# Altium PCB PCB1.PcbDoc
Units mil, origin at the board's own origin, x right, y up, seen from the top; angles counter-clockwise.
Board outline 1771.65 x 708.66 mil, 4 copper layers (Top Layer, Layer 1 (GND), Layer 2 (PWR), Bottom Layer), stack 21.508 mil thick; 30 components, 42 nets, 155 pads, 41 vias.
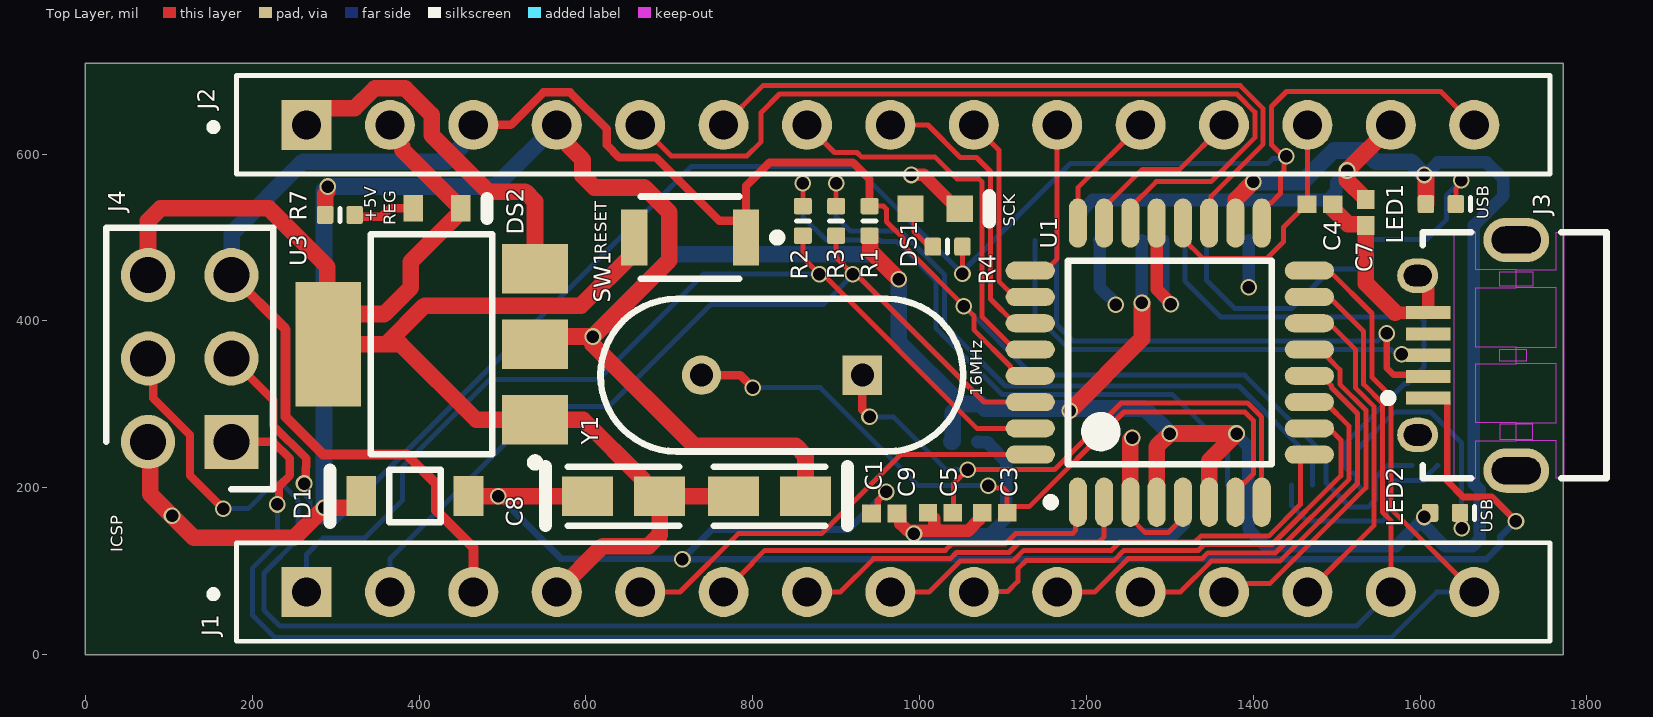
[diagram p0: Top Layer view]
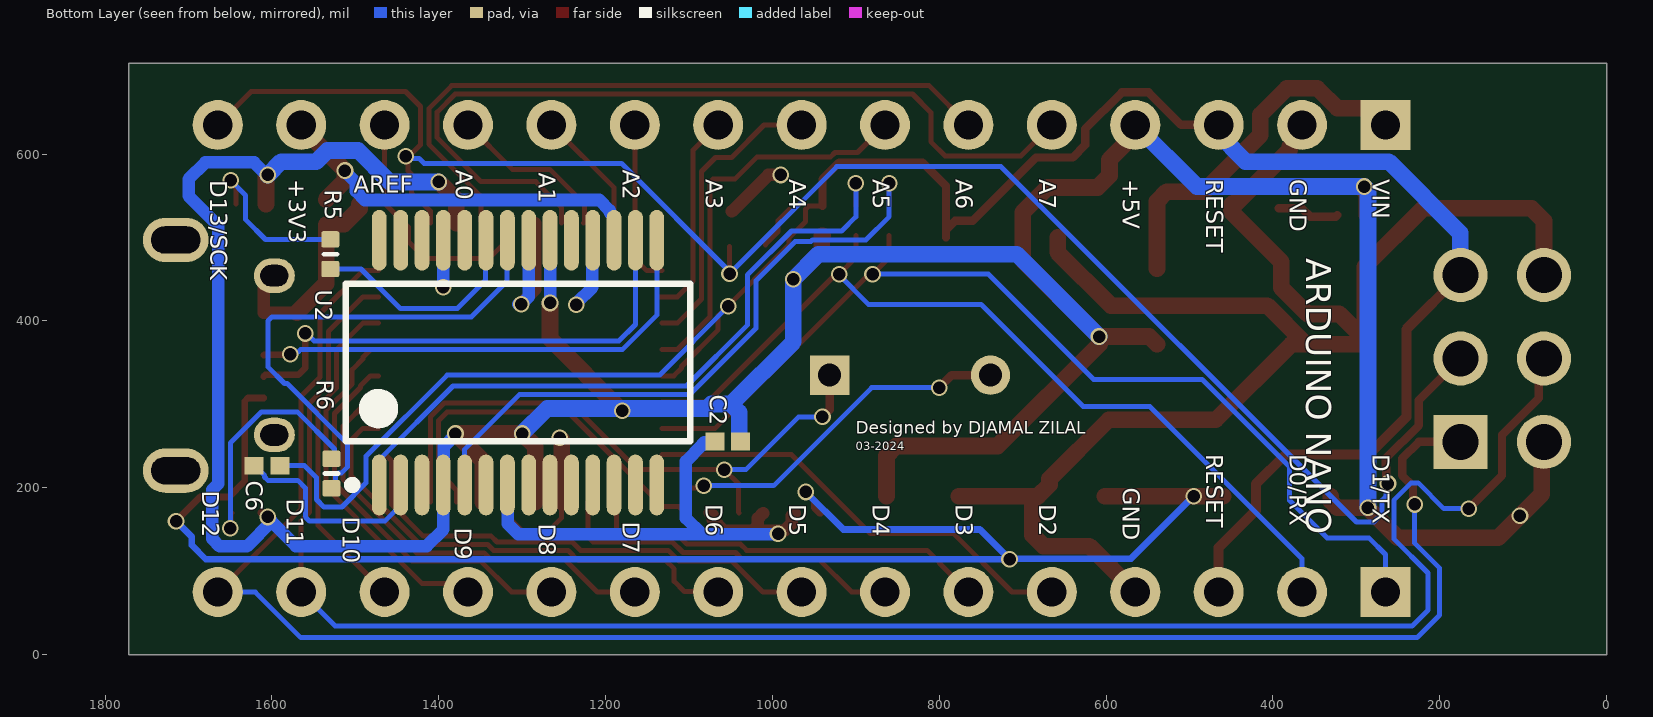
[diagram p1: Bottom Layer view, seen from below]
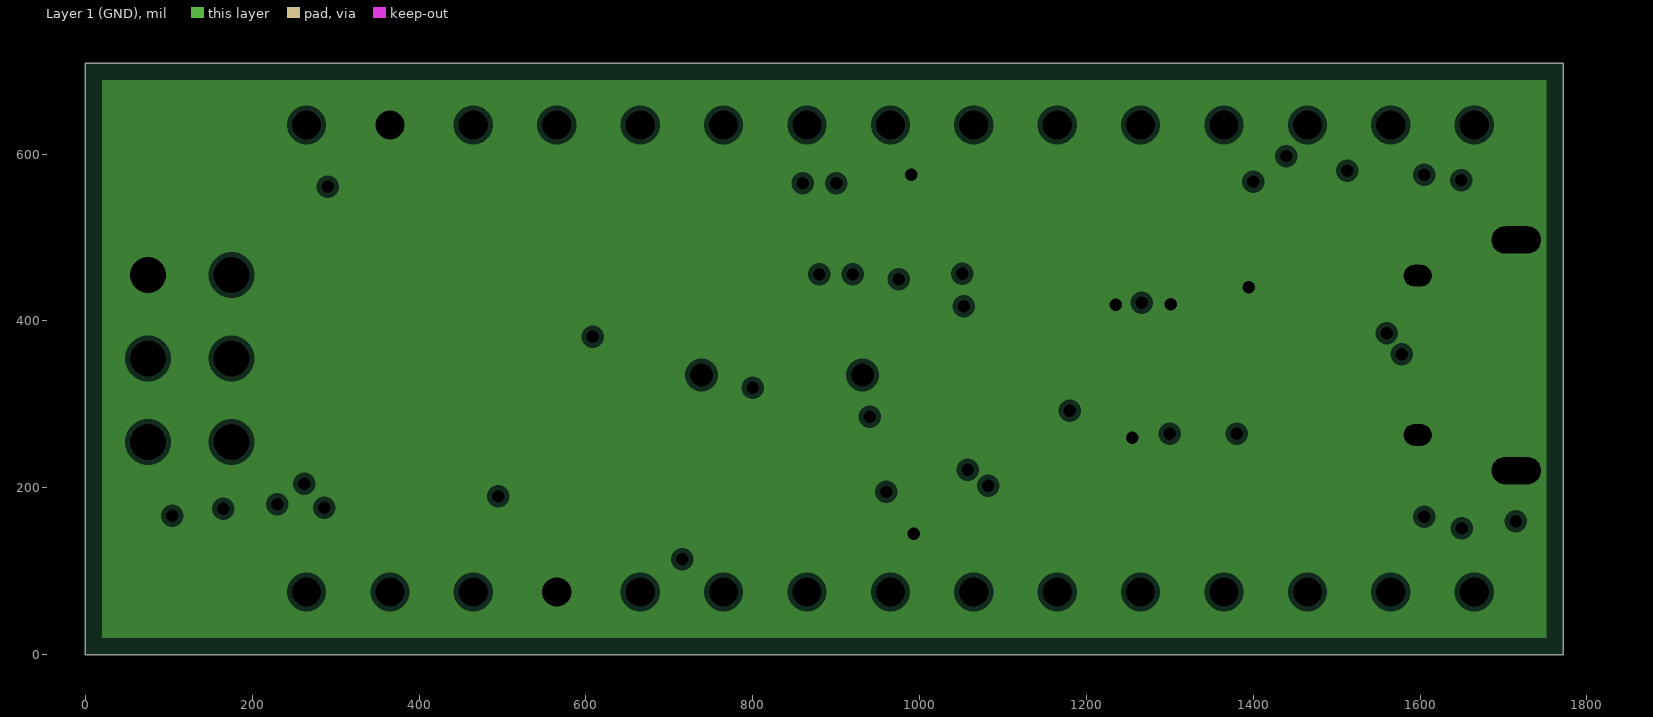
[diagram p2: Layer 1 (GND), clearances drawn from the general rule]
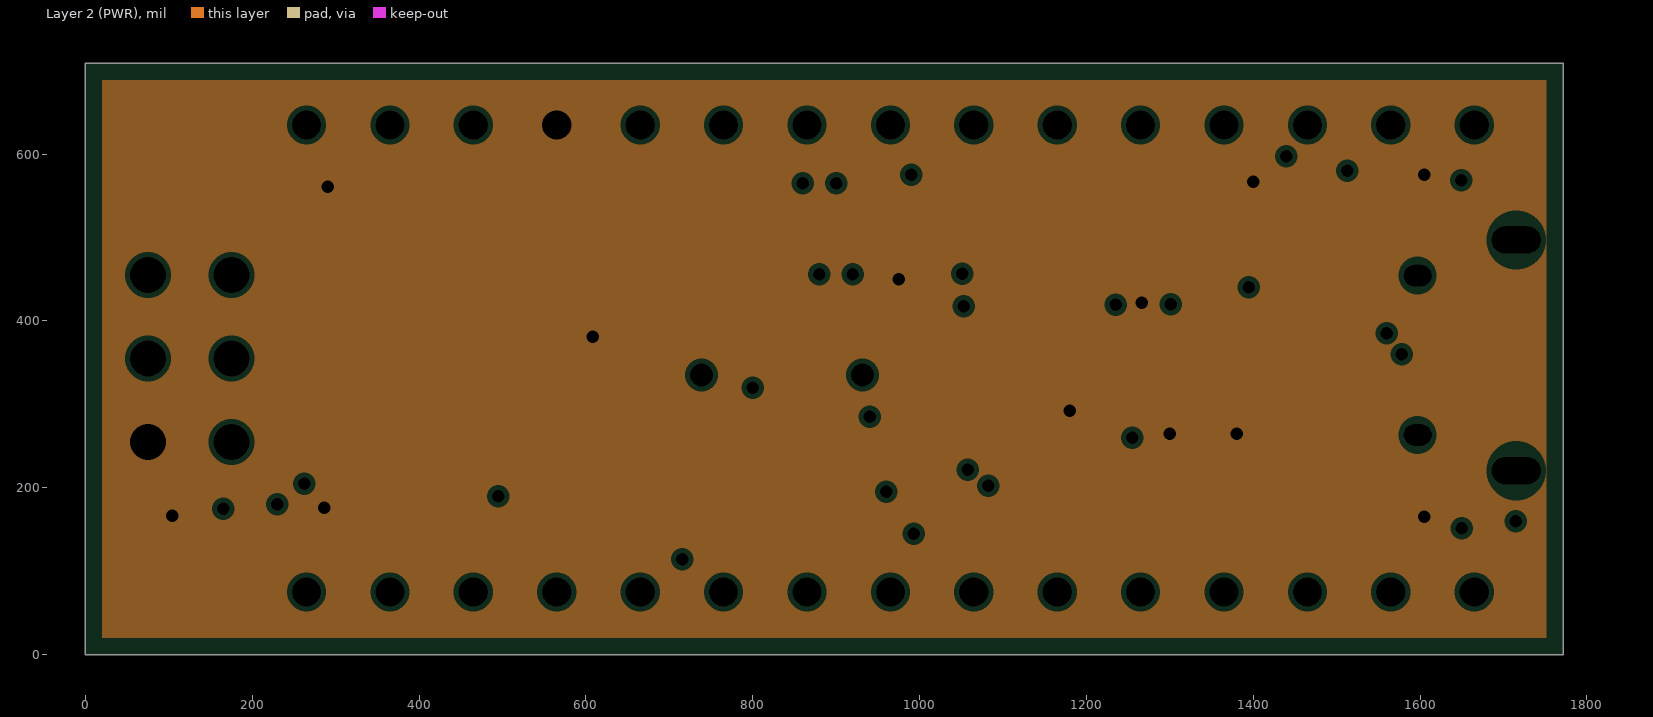
[diagram p3: Layer 2 (PWR), clearances drawn from the general rule]
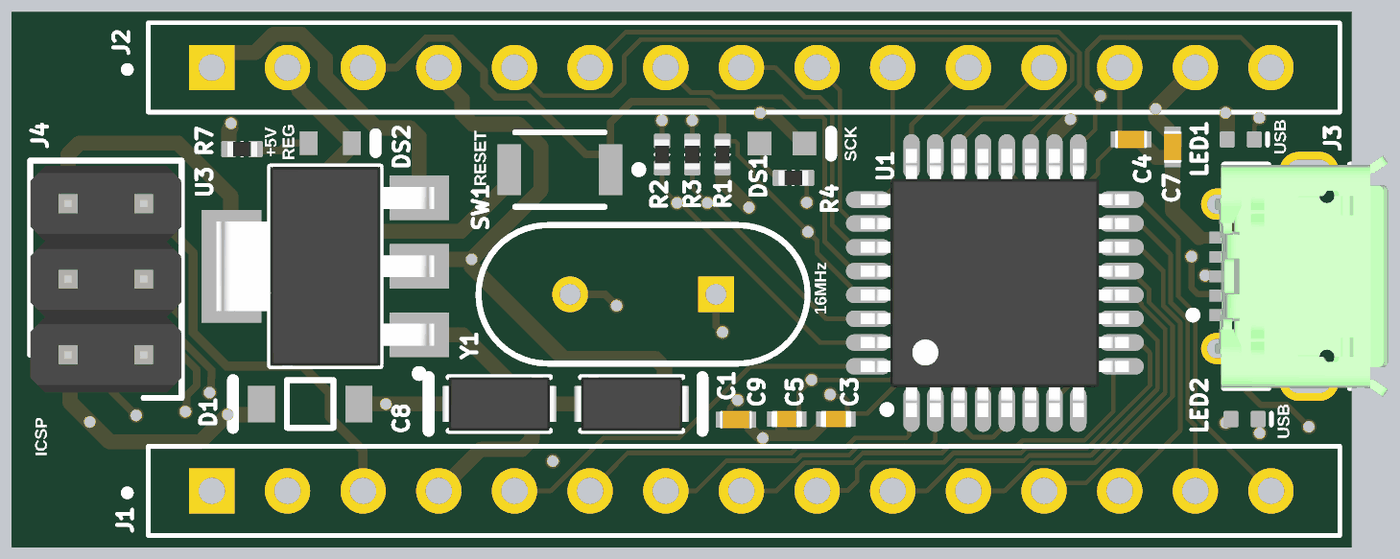
[diagram p4: 3D render of the assembled board from above, using the file's embedded part models]
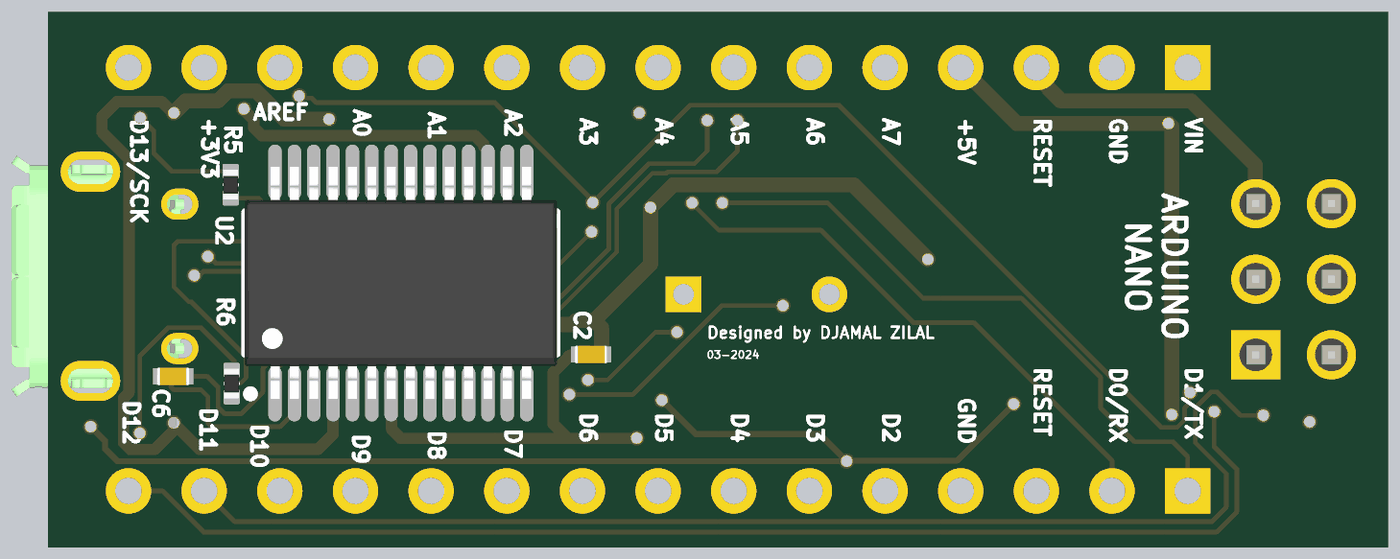
[diagram p5: 3D render of the assembled board from below, using the file's embedded part models]

## Layer stack, top to bottom
Top Solder: solder mask 0.4, Solder Resist, Dk 3.5
Top Layer: signal copper 1.4
Dielectric 2: prepreg 2.8, PP-006, Dk 4.1
Layer 1 (GND): plane copper 0.254, net GND
Dielectric 1: dielectric 12.6, FR-4, Dk 4.8
Layer 2 (PWR): plane copper 0.254, net +5V
Dielectric 3: prepreg 2.8, PP-006, Dk 4.1
Bottom Layer: signal copper 1.4
Bottom Solder: solder mask 0.4, Solder Resist, Dk 3.5

## Board outline
0,0 0,708.66 1771.65,708.66 1771.65,0

## Design rules (kind name [scope] priority, off if disabled: settings)
Clearance [All] p1: gap=4 ignorepadtopadclearanceinfootprint=FALSE
ComponentClearance [All] p1: gap=6 collisioncheckmode=3 verticalgap=6 showdistances=FALSE
DiffPairsRouting [All] p1: maxlimit=10 minlimit=6 mostfreqgap=8 toplayer_minwidth=6 toplayer_maxwidth=15 toplayer_prefwidth=6 bottomlayer_minwidth=6 bottomlayer_maxwidth=15 bottomlayer_prefwidth=6 maxuncoupledlength=500
HoleToHoleClearance [All] p1: gap=6 allowstackedmicrovias=TRUE
MinimumSolderMaskSliver [All] p1: minsoldermaskwidth=4
PlaneClearance [All] p1: clearance=6
PlaneConnect [All] p1: planeconnectstyle=Relief reliefexpansion=20 reliefentries=4 reliefconductorwidth=10 reliefairgap=10
PolygonConnect [All] p1: connectstyle=Relief reliefconductorwidth=10 reliefentries=4 polygonreliefangle="90 Angle" airgapwidth=10
RoutingVias [All] p1: holewidth=6 width=20 viastyle="Through Hole" minholewidth=6 minwidth=20 maxholewidth=20 maxwidth=50
SilkToSilkClearance [All] p1: silktosilkclearance=6
SilkToSolderMaskClearance [IsPad] p1: minsilkscreentomaskgap=4 clearancetoexposedcopper=TRUE
SolderMaskExpansion [All] p1: expansion=0 istentingtop=FALSE
Width [All] p1: maxlimit=20 minlimit=6 preferedwidth=6 minimp=50.000000 maximp=50.000000 favimp=50.000000
22 further rules are at their usual default settings.

## Components (designator, comment, footprint, x,y, rotation, side; value= is the part's Value field where it differs from the comment)
C1 "TAJA475K016RNJ" AVX-TAJ-A-2_L 820,190 r180 top value=4.7µF
C2 "Capacitor 0.1 uF +/- 5% 16 V 0402" CAPC1005X56X25LL10T15 1053.72,255.42 r180 bottom value=100nF
C3 "Capacitor 10 pF +/- 0.25 pF 50 V 0402" CAPC1005X55X30LL05T10 1090,170 r0 top value=10pF
C4 "Capacitor 0.1 uF +/- 5% 16 V 0402" CAPC1005X56X25LL10T15 1480,540 r0 top value=100nF
C5 "Capacitor 10 pF +/- 0.25 pF 50 V 0402" CAPC1005X55X30LL05T10 1025,170 r0 top value=10pF
C6 "Capacitor 0.1 uF +/- 5% 16 V 0402" CAPC1005X56X25LL10T15 1605.95,226.47 r180 bottom value=100nF
C7 "Capacitor 0.1 uF +/- 5% 16 V 0402" CAPC1005X56X25LL10T15 1535,530 r90 top value=100nF
C8 "TAJA475K016RNJ" AVX-TAJ-A-2_L 645,190 r0 top value=4.7µF
C9 "Capacitor 0.1 uF +/- 5% 16 V 0402" CAPC1005X56X25LL10T15 957.78,169.28 r180 top value=100nF
D1 "MBR0520LT1G" ONSC-SOD-123-2-425-04_V 395,190 r180 top
DS1 "HSMA-C190" AVAG-HSMX-C190_V 1018.55,534.37 r0 top
DS2 "TLMB1100-GS08" VISH-TLMX1100-2_V 421.46,535 r0 top
J1 "both parts are inseparated" PCBComponent_1 181.02,15.94 r0 top
J2 "both parts are inseparated" PCBComponent_1 181.02,575.94 r0 top
J3 "ZX62D-B-5P8" HIRO-ZX62D-B-5P8_V 1656.26,358.82 r90 top
J4 "M20-9720345" HDRV6W64P254_2X3_762X508X864P 175,255 r90 top
LED1 "QBLP595-R" QTB-QBLP595_V 1625,540 r180 top
LED2 "QBLP595-IG" QTB-QBLP595_V 1630,170 r180 top
R1 "1KR2J" RESC0402(1005)_L 940,520 r270 top value=1k
R2 "1KR2J" RESC0402(1005)_L 860,520 r90 top value=1k
R3 "1KR2J" RESC0402(1005)_L 900,520 r90 top value=1k
R4 "330R2J" RESC0402(1005)_L 1033.69,489.07 r0 top value=330
R5 "330R2J" RESC0402(1005)_L 1530,480 r90 bottom value=330
R6 "330R2J" RESC0402(1005)_L 1528.76,217.01 r90 bottom value=330
R7 "330R2J" RESC0402(1005)_L 305,527.08 r180 top value=330
SW1 "B3U-1000P" OMRON-B3U-1000_V 725,500 r180 top
U1 "ATMEGA328/P" ATMEGA328/P 1300,350 r90 top
U2 "FT232RL-REEL" FTDI-SSOP-28_M 1305,350 r90 bottom
U3 "NCP1117ST50T3G" ONSC-SOT-223-4-318H-01_A_V 415,372.08 r180 top
Y1 "HC-49US 16.000MHZ" JPY-HC-49US 835,335 r180 top

## Footprints (in the part's own frame and the unit in brackets; to place one, negate y for a bottom-side part, rotate by r counter-clockwise, add the part's x,y. Pads: shape width x height; smd on the part's side, far side on the other; paste and mask are expansions set on the pad)
ATMEGA328/P [mm] "TQFP, 32-Leads, Body 7,00x7,00mm, Pitch 0,80mm, IPC Medium Density"
  oval 1.5x0.55 smd: 1(-4.25,2.8) 2(-4.25,2) 3(-4.25,1.2) 4(-4.25,0.4) 5(-4.25,-0.4) 6(-4.25,-1.2) 7(-4.25,-2) 8(-4.25,-2.8) 17(4.25,-2.8) 18(4.25,-2) 19(4.25,-1.2) 20(4.25,-0.4) 21(4.25,0.4) 22(4.25,1.2) 23(4.25,2) 24(4.25,2.8)
  oval 0.55x1.5 smd: 9(-2.8,-4.25) 10(-2,-4.25) 11(-1.2,-4.25) 12(-0.4,-4.25) 13(0.4,-4.25) 14(1.2,-4.25) 15(2,-4.25) 16(2.8,-4.25) 25(2.8,4.25) 26(2,4.25) 27(1.2,4.25) 28(0.4,4.25) 29(-0.4,4.25) 30(-1.2,4.25) 31(-2,4.25) 32(-2.8,4.25)
  silkscreen extent -4.37,-3.1 3.1,3.75, body extent -4.5,-4.5 4.5,4.5, height 1.2
AVAG-HSMX-C190_V [mm] "SMD, 2-Leads, Body 1.6x0.8mm, Height 0.9mm"
  rect 0.8x0.8 smd: 1(-0.75,0) 2(0.75,0)
  silkscreen extent 1.65,-0.4 1.65,0.4, body extent -0.8,-0.4 0.8,0.4, height 0.9
AVX-TAJ-A-2_L [mm] "Molded Capacitor, 2-Leads, Body 3.4x1.8mm, IPC High Density"
  rect 1.55x1.2 smd: 1(-1.1,0) 2(1.1,0)
  silkscreen extent -2.37,-0.9 1.7,0.9, body extent -1.92,-0.9 1.92,0.9, height 1.8
CAPC1005X55X30LL05T10 [mm] "Chip Capacitor, 2-Leads, Body 1.05x0.55mm, IPC High Density"
  rect 0.56x0.52 smd: 1(-0.38,0) 2(0.38,0)
  body extent -0.53,-0.28 0.53,0.28, height 0.55
CAPC1005X56X25LL10T15 [mm] "Chip Capacitor, 2-Leads, Body 1.10x0.60mm, IPC High Density"
  rect 0.58x0.54 smd: 1(-0.39,0) 2(0.39,0)
  body extent -0.55,-0.3 0.55,0.3, height 0.56
FTDI-SSOP-28_M [mm] "SOP, 28-Leads, Body 10.5x5.6mm, Pitch 0.65mm, IPC Low Density"
  oval 1.85x0.45 smd: 1(-3.725,4.225) 2(-3.725,3.575) 3(-3.725,2.925) 4(-3.725,2.275) 5(-3.725,1.625) 6(-3.725,0.975) 7(-3.725,0.325) 8(-3.725,-0.325) 9(-3.725,-0.975) 10(-3.725,-1.625) 11(-3.725,-2.275) 12(-3.725,-2.925) 13(-3.725,-3.575) 14(-3.725,-4.225) 15(3.725,-4.225) 16(3.725,-3.575) 17(3.725,-2.925) 18(3.725,-2.275) 19(3.725,-1.625) 20(3.725,-0.975) 21(3.725,-0.325) 22(3.725,0.325) 23(3.725,0.975) 24(3.725,1.625) 25(3.725,2.275) 26(3.725,2.925) 27(3.725,3.575) 28(3.725,4.225)
  silkscreen extent -3.85,-5.25 2.4,5.25, body extent -3.9,-5.25 3.9,5.25, height 2
HDRV6W64P254_2X3_762X508X864P [mm]
  rect 1.65x1.65 hole 1.1: 1(0,0)
  round 1.65 hole 1.1: 2(0,2.54) 3(2.54,0) 4(2.54,2.54) 5(5.08,0) 6(5.08,2.54)
  silkscreen extent -1.45,-1.27 6.53,3.81, body extent -1.27,-1.27 6.35,3.81, height 9.5
HIRO-ZX62D-B-5P8_V [mm] "Micro-USB Connector, 9-Leads, Body 7.5x5.6mm, Pitch 0.65mm"
  rect 0.4x1.35 smd: 1(-1.3,1.175) 2(-0.65,1.175) 3(0,1.175) 4(0.65,1.175) 5(1.3,1.175)
  oval 1.05x1.25 hole 0.65 slot 0.85 at 90 deg: 6(-2.425,1.5) 7(2.425,1.5)
  oval 1.35x2 hole 0.825 slot 1.5 at 90 deg: 8(-3.512,-1.5) 9(3.512,-1.5)
  Top Layer keep-out region: 2.55,-2 2.1,-2 2.1,-1 2.55,-1
  Top Layer keep-out region: -2.55,-2 -2.1,-2 -2.1,-1 -2.55,-1
  Top Layer keep-out region: -0.18,-1.8 -0.18,-1 0.18,-1 0.18,-1.8
  Top Layer keep-out region: -3.75,-2.725 -2.6,-2.725 -2.6,-1.5 -2.05,-1.5 -2.05,-2.725 -0.25,-2.725 -0.25,-1.5 0.25,-1.5 0.25,-2.725 2.05,-2.725 2.05,-1.5 2.6,-1.5 2.6,-2.725 3.75,-2.725 3.75,-2.95 -3.75,-2.95
  Top Layer keep-out region: -2.6,-1.5 -2.05,-1.5 -2.05,-0.275 -0.25,-0.275 -0.25,-1.5 0.25,-1.5 0.25,-0.275 2.05,-0.275 2.05,-1.5 2.6,-1.5 2.6,-0.275 3.75,-0.275 3.75,0.395 -3.75,0.395 -3.75,-0.275 -2.6,-0.275
  silkscreen extent -3.75,-4.25 3.75,2.52, body extent -4.05,-4.15 4.05,1.65, height 2.75
JPY-HC-49US [mm] "THD, 2-Leads, Body 11.05x4.65mm, Pitch 4.9mm"
  rect 1.2x1.2 hole 0.7: 1(-2.45,0)
  round 1.2 hole 0.7: 2(2.45,0)
  silkscreen extent -5.53,-2.32 5.53,2.32, body extent -5.53,-2.33 5.52,2.32, height 3.5
OMRON-B3U-1000_V [mm] "SMD, 2-Leads, Body 3x2.5mm"
  rect 0.8x1.7 smd: 1(-1.7,0) 2(1.7,0)
  silkscreen extent -2.78,-1.25 1.5,1.25, body extent -1.5,-1.25 1.5,1.25, height 1.75
ONSC-SOD-123-2-425-04_V [mm] "SOD, 2-Leads, Body 2.69x1.6mm"
  rect 0.91x1.22 smd: 1(-1.635,0) 2(1.635,0)
  silkscreen extent -0.78,-0.8 2.59,0.8, body extent -1.35,-0.8 1.35,0.8, height 1.35
ONSC-SOT-223-4-318H-01_A_V [mm] "SOT223, 4-Leads, Body 6.7x3.7mm, Pitch 2.3mm"
  rect 2x1.5 smd: 1(-3.15,2.3) 2(-3.15,0) 3(-3.15,-2.3)
  rect 2x3.8 smd: 4(3.15,0)
  silkscreen extent -3.27,-3.35 1.85,3.72, body extent -3.65,-3.35 3.65,3.35, height 1.8
PCBComponent_1 [mil]
  rect 60x60 hole 35: 1(83.98,59.06)
  round 60 hole 35: 2(183.98,59.06) 3(283.98,59.06) 4(383.98,59.06) 5(483.98,59.06) 6(583.98,59.06) 7(683.98,59.06) 8(783.98,59.06) 9(883.98,59.06) 10(983.98,59.06) 11(1083.98,59.06) 12(1183.98,59.06) 13(1283.98,59.06) 14(1383.98,59.06) 15(1483.98,59.06)
  silkscreen extent -31,0 1575,118
QTB-QBLP595_V [mm] "SMD, 2-Leads, Body 1x0.5mm"
  rrect25% 0.5x0.55 smd: 1(-0.455,0) 2(0.455,0)
  silkscreen extent -0.9,-0.2 -0.9,0.2, body extent -0.5,-0.25 0.5,0.25, height 0.5
RESC0402(1005)_L [mm] "Chip Resistor, Body 1.0x0.5mm, IPC High Density"
  rrect25% 0.5x0.55 smd: 1(-0.45,0) 2(0.45,0)
  silkscreen extent 0,-0.2 0,0.2, body extent -0.5,-0.25 0.5,0.25, height 0.3
VISH-TLMX1100-2_V [mm] "SMD, 2-Leads, Body 1.6x0.8mm"
  rect 0.6x0.8 smd: 1(-0.725,0) 2(0.725,0)
  silkscreen extent 1.53,-0.3 1.53,0.3, body extent -0.8,-0.4 0.8,0.4, height 0.65

## Part data
C1 C8: library part CMP-001-00033-7, "Aluminum Electrolytic Capacitor, 4.7 uF, +/- 20%, 50 V, -40 to 85 degC, 2-Pin THD, RoHS, Bulk", Capacitor Type=Electrolytic, Case/Package=Radial, Manufacturer=Panasonic, Max Operating Temperature=85°C, Min Operating Temperature=-40°C, Package Description="2-Pin Radial Lead, Dia 5 mm, Height 12 mm", Package Quantity=200, Package Reference=CAPPR55-200-1100X500X1200, Ripple Current=45mA, Tolerance=20%, Voltage Rating=50V, Datasheet URL=https://industrial.panasonic.com/cdbs/www-data/pdf/RDF0000/ABA0000C1218.pdf, Datasheet Version="Rev. 05, 10/2016", Diameter=5mm, Lead Pitch=2mm, Manufacturer URL=http://www.panasonic.com/, Mounting Technology=TH, Packaging=Bulk, Pins=2, Ripple Current (AC)=45mA, RoHS Compliant=True
C2 C4 C6 C7 C9: library part CMP-001-00001-6, "Chip Capacitor, 0.1 uF, +/- 5%, 16 V, 0402 (1005 Metric)", Capacitor Type=Ceramic, Case/Package=0402, Max Operating Temperature=125°C, Min Operating Temperature=-55°C, Tolerance=5%, Voltage Rating=16V, Mounting Technology=SM, Pins=2, RoHS Compliant=True
C3 C5: library part CMP-001-00011-6, "Chip Capacitor, 10 pF, +/- 0.25 pF, 50 V, 0402 (1005 Metric)", Capacitor Type=Ceramic, Case/Package=0402, Max Operating Temperature=125°C, Min Operating Temperature=-55°C, Tolerance=0.25%, Voltage Rating=50V, Mounting Technology=SM, Pins=2, RoHS Compliant=True
D1: library part CMP-004-00003-2, "Schottky Power Rectifier, 20 V, 5.5 A, -65 to 125 degC, 2-Pin SMD, RoHS, Tape and Reel", Case/Package=SOD, Forward Current=500mA, Forward Voltage=385mV, Manufacturer="ON Semiconductor", Max Operating Temperature=125°C, Max Surge Current=5.5A, Min Operating Temperature=-65°C, Package Description="2-Pin Surface Mount Device, Body 2.69 x 1.6 mm", Package Quantity=3000, Package Reference=SOD-123-2-425-04, Peak Reverse Current=250uA, Datasheet URL=http://www.onsemi.cn/pub_link/Collateral/MBR0520LT1-D.PDF, Datasheet Version="Rev. 6, 01/2012", Elements=1, Manufacturer URL=http://www.onsemi.com/, Mounting Technology=SM, Packaging=TapeandReel, Pins=2, RoHS Compliant=True
DS1: library part CMP-007-00011-2, "LED Uni-Color Amber, 60 mW, 20 mA, -40 to 85 degC, 2-Pin SMD, RoHS, Tape and Reel", Case/Package=0603, Colour=Orange, Forward Current=20mA, Forward Voltage=1.9V, Manufacturer=Avago, Max Operating Temperature=85°C, Min Operating Temperature=-40°C, Package Description="2-Pin Surface Mount Device, Body 1.6 x 0.8 mm, Height 0.9 mm", Package Quantity=4000, Package Reference=HSMX-C190, Power=60mW, Datasheet URL=http://docs.avagotech.com/docs/AV02-0112EN, Datasheet Version=Sep-10, Illumination Colour=Orange, Lens Style=Diffused, Luminous Intensity=90mcd, Manufacturer URL=http://www.avagotech.com/, Mounting Technology=SM, Nominal Vf=1.9V, Packaging=TapeandReel, Pins=2, RoHS Compliant=True, Viewing Angle=170degrees
DS2: library part CMP-007-00028-2, "Blue LED, 10 mA, 3.9 V, -40 to 100 degC, 2-Pin SMD (0603), RoHS, Tape and Reel", Case/Package=0603, Colour=Blue, Forward Current=10mA, Forward Voltage=3.9V, Manufacturer="Vishay Semiconductor", Max Operating Temperature=100°C, Min Operating Temperature=-40°C, Package Description="2-Pin Surface Mount Device, Body 1.6 x 0.8 mm", Package Quantity=3000, Power=68mW, Datasheet URL=http://download.siliconexpert.com/pdfs/2016/8/7/12/43/26/667/vsh_/manual/379263299541529tlmb1100.pdf, Datasheet Version="Rev. 2.7, 03/2016", Illumination Colour=Blue, Lens Style=Diffused, Luminous Intensity=5mcd, Manufacturer URL=http://www.vishay.com/, Mounting Technology=SM, Nominal Vf=3.9V, Package Reference=0603, Packaging=TapeandReel, Pins=2, RoHS Compliant=True, Viewing Angle=160degrees
J1 J2: library part "Header 15"
J3: library part CMP-002-00043-2, "Right Angle Receptacle Connector, Micro USB, 5 Position, Height 2.65 mm, -30 to 85 degC, RoHS, Tape and Reel", Current Rating=1A, Manufacturer="Hirose Electric", Max Operating Temperature=85°C, Min Operating Temperature=-30°C, Package Description="USB Connector, 5 Position Surface Mount, Length 8 mm, Height 2.65 mm", Package Quantity=2000, Case/Package=ZX62D-B-5P8, Connector Type=USB, Contact Material=Copper, Contact Plating=Gold, Datasheet URL=https://www.hirose.com/product/en/download_file/key_name/ZX62D-B-5P8/category/Catalog/doc_file_id/31704/?file_category_id=5&item_id=02420034000&is_series=, Datasheet Version=Aug-16, Gender=Male, Housing Material=Plastic, Lead Pitch=0.65mm, Manufacturer URL=https://www.hirose.com, Mounting Technology=SM, Package Reference=ZX62D-B-5P8, Package URL=https://www.hirose.com/product/en/download_file/key_name/ZX62D-B-5P8/category/Drawing%20(2D)/doc_file_id/36535/?file_category_id=6&item_id=02420034000&is_series=, Packaging=TapeandReel, Pins=5, RoHS Compliant=True, Rows=1
J4: "Connector", Manufacturer_Name=Harwin, Mouser Part Number=855-M20-9720345, Datasheet Link=https://cdn.harwin.com/pdfs/M20-972.pdf, Height=8.64mm, Manufacturer_Part_Number=M20-9720345, Mouser Price/Stock=https://www.mouser.co.uk/ProductDetail/Harwin/M20-9720345?qs=vF78I%252BjhbY8b2N4EUBH%2Fyg%3D%3D
LED1: library part CMP-007-00040-3, "Chip LED 0402, Red, 0.02 A, 2.0 to 2.5 V, -40 to 80 degC, 2-Pin SMD, RoHS, Tape and Reel", Case/Package=0402, Colour=Red, Mounting Technology=SMT, Pins=2, RoHS Compliant=Yes
LED2: library part CMP-007-00041-3, "Chip LED 0402, Green, 0.02 A, 3.1 to 3.7 V, -40 to 80 degC, 2-Pin SMD, RoHS, Tape and Reel", Case/Package=0402, Colour=Green, Mounting Technology=SMT, Pins=2, RoHS Compliant=Yes
R1 R2 R3: library part CMP-009-00075-2, "1K 0.063W 5% 0402 (1005 Metric)  SMD", Case/Package=0402, Power=63mW, Tolerance=5%, Mounting Technology=SMT, Pins=2
R4 R5 R6 R7: library part CMP-009-00095-2, "330R 0.063W 5% 0402 (1005 Metric)  SMD", Case/Package=0402, Power=63mW, Tolerance=5%, Mounting Technology=SMT, Pins=2
SW1: library part CMP-011-00000-2, "Tactile Switch, SPST-NO, 0.05 A, 12 V, -25 to 70 degC, 2-Pin SMD, RoHS, Tape and Reel", Case/Package=B3U-1000, Contact Current Rating=50mA, IP Rating=IP40, Manufacturer="Omron Electronic Components", Max Contact Resistance=100mohm, Max Operating Temperature=70°C, Max Voltage Rating (DC)=12V, Min Operating Temperature=-25°C, Operating Force=153gf, Package Description="2-Pin Surface Mount Device, Body 3 x 2.5 mm", Package Quantity=3500, Resistance=0.1Ohm, Contact Material=Silver, Current Rating=50mA, Datasheet URL=http://www.omron.com/ecb/products/pdf/en-b3u.pdf, Datasheet Version=Jan-15, Manufacturer URL=http://www.omron.com/, Max Current Rating=50mA, Mounting Technology=SM, Package Reference=B3U-1000, Packaging=TapeandReel, RoHS Compliant=True, Throw Configuration=SPST, Voltage Rating=12V, Voltage Rating (DC)=12V
U2: library part CMP-015-00000-2, "USB UART IC, -0.5 to 6 V, 24 mA, -40 to 85 degC, 28-Pin SSOP, RoHS, Tape and Reel", Case/Package=SSOP, Manufacturer="Future Technology Devices International (FTDI)", Max Operating Temperature=85°C, Max Supply Voltage=5.25V, Min Operating Temperature=-40°C, Min Supply Voltage=3.3V, Nominal Supply Voltage=5V, Package Quantity=2000, Channels=1, Data Rate=3Mbps, Datasheet URL=http://datasheet.octopart.com/FT232RL-FTDI-datasheet-120501.pdf, Datasheet Version="Rev. 1.04, 02/2006", Interface=UART, Manufacturer URL=http://www.ftdichip.com/, Packaging=TapeandReel, Pins=16, RoHS Compliant=True
U3: library part CMP-019-00031-3, "Low-Dropout Positive Fixed Voltage Regulator, 1 A, 5 V Vout, 0 to 125 degC, 4-Pin SOT-223, Pb-Free, Tape and Reel", Case/Package=TO-261-4, Current Rating=-600A, Dropout Voltage=1.2V, Manufacturer="ON Semiconductor", Max Input Voltage=20V, Max Operating Temperature=125°C, Max Ouput Current=1A, Min Input Voltage=3.5V, Min Operating Temperature=0°C, Nominal Output Voltage=5V, Package Description="4-Pin Small Outline Transistor, Body 6.5 x 3.5 mm, Pitch 2.3 mm", Package Quantity=4000, Package Reference=SOT-223-4-318H-01_A, Datasheet URL=https://datasheet.ciiva.com/28483/1748260-28483320.pdf, Datasheet Version="Rev. 26, 08/2013", Manufacturer URL=http://www.onsemi.com/, Mounting Technology=SM, Output Current=1A, Output Voltage=5V, Outputs=1, Packaging=TapeandReel, Pins=3, RoHS Compliant=True
Y1: library part CMP-003-00005-2, "Crystal, 16 MHz, +/- 30 ppm, 18 pF, -20 to 70 degC, 2-Pin THD", Case/Package=HC-49US, Frequency=16MHz, Manufacturer="Jing peng yuan", Package Description="2-Pin Throug Hole Device, Body 11.05 x 4.65 mm, Pitch 4.9 mm", Datasheet URL=https://statics3.seeedstudio.com/images/opl/datasheet/306010014.pdf, Datasheet Version=May-15, Mounting Technology=TH, Package Reference=HC-49US, RoHS Compliant=Unknown
U1: ComponentLink1Description=DATASHEET, ComponentLink1URL=https://ww1.microchip.com/downloads/en/DeviceDoc/Atmel-7810-Automotive-Microcontrollers-ATmega328P_Datasheet.pdf, CREATED By=DJAMALZILAL, DATA CREATED=2024, DATASHEET=https://ww1.microchip.com/downloads/en/DeviceDoc/Atmel-7810-Automotive-Microcontrollers-ATmega328P_Datasheet.pdf, OrganizationName=Djamal_Organization

## Via types
v1: diameter 20, hole 15, Top Layer to Bottom Layer, 41 vias

## Nets (pads, with @x,y where several pads share a name; then routed paths per layer and width w, separated by ;. In a path a pad name is that pad's centre, name@x,y a point inside that pad or via, vN(x,y) a via of type N, cw(c..) or ccw(c..) an arc to the next point about the centre after c; other vN are vias at no path point)
+3V3: C7.2 J2.14 U2.17 | length 502.9
  Top Layer w20: C7.2 1534.37,545.98 1534.37,546.77 1512.5,568.64 v1(1512.5,580.34) 1565,632.84 J2.14
  Bottom Layer w15: U2.17 1189.84,524.95 1195.07,530.18 1195.07,532.65 1207.43,545 1488.94,545 1499.55,555.61 1499.55,566.03 1512.5,578.98 v1(1512.5,580.34)
+5V: C1.1 C2.2 D1.2 J2.4 J4.2 LED1.2 LED2.2 R1.2 R7.2 U1.4 U1.6 U1.18 U2.4 U2.20 U3.2 | length 4723.6
  Top Layer w10: v1(1605,165) 1607.09,165 LED2.2
  Top Layer w20: J4.2 77.48,252.52 77.48,192.52 130,140 250,140 v1(285.98,175.98) 322.72,175.98 330.63,183.9 D1.2 ; R7.2 287.44,527.23 287.44,552.44 v1@290,555 ; U3.2 548.24,381.3 v1(608.38,381.3) 700,472.92 700,530 670,560 610,560 595.86,574.14 595.86,593.32 565,624.18 J2.4 ; v1@607.92,372.08 730,250 851.59,250 863.31,238.28 C1.1 ; R1.2 940.67,502.28 940.83,502.13 940.83,484.17 v1(975,450) ; v1(1180.09,292.25) 1266.61,378.78 v1(1266.61,421.61) ; U1.4 1284.25,249.25 v1(1300,265) v1(1380,265) 1347.24,232.24 U1.6 ; U1.18 1379.06,517.64 1379.06,545.83 v1(1399.89,566.67) ; v1(1605,575) 1607.09,572.91 LED1.2
  Bottom Layer w15: v1(1266.61,421.61) U2.20 ; v1(1380,265) 1380,263.65 1394.05,249.6 1394.05,203.87 U2.4 1394.57,150.06 1414.63,130 1571.21,130 1605,163.79 v1(1605,165) ; v1@1600,159.87 1630,129.87 1662.71,129.87 1671.5,138.65 1671.5,197.71 1664.44,204.76 1664.44,514.44 1700,550 1700,570 1680,590 1621.35,590 1606.35,575 v1(1605,575)
  Bottom Layer w20: v1(285.98,175.98) 285.98,556.66 v1(290.43,561.1) 491.1,561.1 J2.4 ; v1(608.38,381.3) 707.08,480 945,480 v1(975,450) 975,375 1049.65,300.35 ; C2.2 1039.15,255.42 1039.78,256.05 1039.78,290.49 1049.65,300.35 ; v1(1300,265) 1270,295 1078.51,295 1073.15,300.35 1049.65,300.35 ; v1(1399.89,566.67) 1458.89,566.67 1496.56,604.34 1533.44,604.34 1546.77,591 1589,591 v1(1605,575)
  other v1: 103.74,166.26
A0: J2.12 U1.23 | length 202.4
  Top Layer w6: U1.23@1226.26,517.32 1225.07,518.52 1225.07,539.83 1267.08,581.84 1311.84,581.84 J2.12
A1: J2.11 U1.24 | length 148.8
  Top Layer w6: U1.24 1189.76,559.76 J2.11
A2: J2.10 U1.25 | length 198.6
  Top Layer w6: U1.25 1150.58,460.24 1165,474.65 J2.10
A3: J2.9 U1.26 | length 250.2
  Top Layer w6: J2.9 1095,605 1095,447.72 1113.98,428.74 U1.26 U1.26@1137.68,428.74
A4: J2.8 U1.27 | length 355.7
  Top Layer w6: J2.8 965.15,634.85 1010,634.85 1048.85,596 1068.14,596 1085,579.14 1085,426.22 1113.98,397.24 U1.27
A5: J2.7 U1.28 | length 474
  Top Layer w6: J2.7 898,602 924.97,602 930.65,596.32 1018.68,596.32 1045,570 1071.49,570 1075,566.49 1075,404.72 1113.98,365.75 U1.28
A6: J2.6 U1.19 | length 841.8
  Top Layer w6: J2.6 812,682 1384.47,682 1412,654.47 1412,612 1349.65,549.65 1349.65,519.73 U1.19
A7: J2.5 U1.22 | length 1045.7
  Top Layer w6: J2.5 702,598 793,598 810,615 810,650 832,672 1380.33,672 1402,650.33 1402,619.67 1349.34,567.01 1283.74,567.01 1252.76,536.02 U1.22
AREF: C4.1 J2.13 U1.20 | length 309.8
  Top Layer w6: U1.20 1315.75,498.62 1339.37,475 1416.49,475 1436.36,494.87 1436.36,512.5 1463.86,540 C4.1 1465,540.35 J2.13
D0/RX: J1.2 R3.1 U1.30 | length 1066.4
  Top Layer w6: R3.1 900,476 v1(920,456) ; v1@922,458 1077.24,302.76 U1.30
  Bottom Layer w6: J1.2 365,115 547.5,297.5 627.5,297.5 750,420 885,420 920,455 v1(920,456)
D1/TX: J1.1 R2.1 U1.31 | length 1205.2
  Top Layer w6: R2.1 860,476 v1(880,456) ; v1@882,458 1068.74,271.26 U1.31
  Bottom Layer w6: J1.1 265,120 285,140 335,140 380,185 380,225 485,330 615,330 741,456 v1(880,456)
D2: J1.5 U1.32 | length 535.9
  Top Layer w6: J1.5 712.67,75 782.67,145 882.34,145 977.1,239.76 U1.32
D3: J1.6 U1.1 | length 487.8
  Top Layer w6: J1.6 799.63,109.63 ; 799.34,109.92 814.42,125 1030.86,125 1038.43,132.57 1102.57,132.57 1115,145 1183.25,145 1186.77,148.51 1186.77,179.68 U1.1
D4: J1.7 U1.2 | length 425.1
  Top Layer w6: J1.7 905,75 945,115 1036.95,115 1044.23,122.28 1107.28,122.28 1120,135 1215,135 1221.26,141.26 U1.2
D5: J1.8 U1.9 | length 597.8
  Top Layer w6: J1.8 1011.44,75 1048.72,112.28 1112.28,112.28 1125,125 1230,125 1240,135 1330.25,135 1337.25,142 1418.47,142 1456.62,180.15 1456.62,232.53 U1.9@1463.85,239.76
D6: J1.9 U1.10 | length 587.9
  Top Layer w6: J1.9 1065.49,75.49 1105.49,75.49 1117.86,87.86 1117.86,102.86 1127.62,112.62 1232.62,112.62 1245,125 1334.39,125 1341.39,132 1422.61,132 1505,214.39 1505,257.28 1491.02,271.26 U1.10@1472.32,271.26
D7: J1.10 U1.11 | length 529.2
  Top Layer w6: J1.10 1210,75 1250,115 1338.53,115 1345.53,122 1426.76,122 1515,210.25 1515,273.78 1486.02,302.76 U1.11
D8: J1.11 U1.12 | length 470.5
  Top Layer w6: J1.11 1312.67,75 1349.67,112 1432,112 1525,205 1525,288.99 1493.85,320.14 1493.85,322.19 1481.79,334.25 U1.12@1472.32,334.25
D9: J1.12 U1.13 | length 419
  Top Layer w6: J1.12 1375.33,85.33 1420.33,85.33 1535,200 1535,293.13 1503.85,324.28 1503.85,341.64 1490.9,354.59 1490.9,356.63 1481.79,365.75 U1.13@1472.32,365.75
D10: J1.13 U1.14 | length 396.4
  Top Layer w6: J1.13 1545,155 1545,297.27 1522.37,319.9 1522.37,365.9 1491.02,397.24 U1.14@1472.32,397.24
D11/MOSI: J1.14 J4.4 U1.15 | length 2256.2
  Top Layer w6: U1.15@1472.32,428.74 1491.02,428.74 1532.37,387.39 1532.37,324.05 1555,301.42 1555,170.86 1565,160.86 J1.14
  Top Layer w10: J4.4 81.14,348.86 81.14,307.52 125.26,263.4 125.26,214.74 v1(165,175)
  Bottom Layer w6: v1(165,175) 195,175 225.86,205.86 234.14,205.86 255,185 255,138.85 214,97.85 214,53.27 232.96,34.31 1524.31,34.31 J1.14
D12/MISO: J1.15 J4.1 U1.16 | length 2259.4
  Top Layer w6: U1.16@1472.32,460.24 1491.02,460.24 1542.37,408.89 1542.37,332.63 1565,310 1565,175 J1.15
  Top Layer w10: J4.1 225,255 245,235 245,214.89 231.91,201.8 231.91,181.91 v1(230,180)
  Bottom Layer w6: v1(230,180) 230,133.65 200,103.65 200,47.47 227.16,20.31 1565.46,20.31 1620,74.85 1664.85,74.85 J1.15
D13/SCK: J2.15 J4.3 R4.2 U1.17 | length 2153.8
  Top Layer w6: R4.2 v1(1051.4,456.55) v1@1051.88,456.07 ; U1.17 1410.24,531.79 1419.74,541.29 1421.01,541.29 1432.49,552.78 1432.49,575.49 1436.76,579.75 1436.76,594.81 v1(1439.44,597.49) 1435.67,597.49 1422,611.16 1422,657 1440,675 1625,675 J2.15
  Top Layer w10: J4.3 225,305 225,274.8 264.8,235 264.8,225 263.9,224.1 263.9,206.91 v1(261.98,205)
  Bottom Layer w6: v1(261.98,205) 264.66,202.32 264.66,189.48 268.98,185.16 268.98,168.94 278.94,158.98 299.84,158.98 725.86,585 922.95,585 v1(1051.4,456.55) 1051.4,459.38 1180.8,588.78 1417.44,588.78 1423.47,594.81 1436.76,594.81 v1(1439.44,597.49)
GND: C1.2 C2.1 C3.1 C4.2 C5.1 C7.1 C8.2 C9.1 DS1.2 DS2.2 J1.4 J2.2 J3.5 J3.6 J3.7 J3.8 J3.9 J4.6 SW1.2 U1.3 U1.5 U1.21 U2.7 U2.18 U2.21 U2.25 U3.1 U3.4 | length 3457.3
  Top Layer w6: U1.3 1252.76,163.98 1270.58,146.15 1297.92,146.15 1315.75,163.98 U1.5
  Top Layer w15: C9.1@973.49,169.64 C9.1 973.92,169.28 977.05,166.15 977.05,157.05 985.84,148.26 1024.17,148.26 ; v1(990,575) 1004.73,575 DS1.2@1048.48,531.25 ; C5.1@1011.19,169.64 1017.44,163.39 1017.44,155 1024.17,148.26 ; C3.1 1072.3,167.26 1071.52,167.26 1071.52,161.65 1058.13,148.26 1024.17,148.26 ; U1.21 1284.25,438.09 1300.99,421.35 v1(1300.99,420) ; 1570,410 J3.5 1610,438.31 1597.2,451.1 J3.7
  Top Layer w20: J4.6 75,520 90,535 220,535 290,465 290,373.06 U3.4 ; J2.2 365,624.18 379.93,609.25 379.93,605.07 444.25,540.75 448.19,540.75 450,538.94 450,531.06 390,471.06 390,440 358.28,408.28 320.35,408.28 290.98,378.91 U3.4 ; J1.4 620,130 675,130 688.31,143.31 C8.2 ; SW1.2 658.07,482.28 594.15,418.36 406.64,418.36 360.35,372.08 ; C1.2 C8.2 ; U1.3 1252.76,257.76 v1(1255,260) ; C4.2 1495,539.65 1495,534.65 1513.58,516.06 1534.37,516.06 1535,515.43 C7.1 1535,445 1570,410 ; U3.4 360.35,372.08 ; 360.35,372.08 377.92,372.08 468.47,281.53 U3.1 596.78,281.53 667.8,210.51 667.8,203.62 681.42,190 C8.2
  Bottom Layer w15: v1@993.8,144.35 1084.68,144.35 ; C2.1 1070.04,254.44 1081.7,254.44 1084.27,251.87 1084.27,251.08 1103.77,231.59 1103.77,163.44 1084.68,144.35 ; U2.18 1215.95,496.13 1215.95,440.34 1235.38,420.91 v1(1235.38,419.55) ; U2.21@1291.68,497.17 U2.21 1292.2,428.79 v1(1300.99,420) v1@1305,420 ; U2.7 1317.28,202.83 1317.28,156.63 1305,144.35 1084.68,144.35 ; U2.25 v1(1394.57,440.43) v1@1395,440
  other v1: 993.24,144.91
NetC3_2: C3.2 U1.7 Y1.2 | length 907.1
  Top Layer w6: v1(1082.27,202.5) 1084.77,200 1100,200 1104.96,195.04 C3.2 1112.2,177.24 1131.38,177.24 1245.05,290.91 1389.95,290.91 1400.24,280.62 1400.24,216.59 1389.9,206.25 1387.85,206.25 1378.74,197.14 U1.7
  Top Layer w10: Y1.2 785,335 v1(800,320)
  Bottom Layer w6: v1(800,320) 880.96,320 998.46,202.5 v1(1082.27,202.5)
NetC5_2: C5.2 U1.8 Y1.1 | length 771.2
  Top Layer w6: C5.2 1040.75,170.79 1040.75,204.83 v1(1057.68,221.76) 1057.85,221.94 1161.94,221.94 1241.65,301.65 1393.35,301.65 1410.24,284.76 U1.8
  Top Layer w10: Y1.1@917.36,320.9 Y1.1 931.46,293.54 v1(940,285)
  Bottom Layer w6: v1(940,285) 968.57,285 1031.81,221.76 v1(1057.68,221.76)
NetC6_1: C6.1 U2.2 | length 256.9
  Bottom Layer w6: U2.2 1445.75,178.95 1464.77,159.93 1554.93,159.93 1560,165 1560,199.65 1569.2,208.84 1604.91,208.84 1609.01,212.95 1609.01,214.97 1620.52,226.47 C6.1
NetDS1_1: DS1.1 R4.1 | length 53.6
  Top Layer w6: DS1.1@980.29,533.41 993.04,520.66 993.04,507.29 1008.02,492.31 R4.1@1008.02,491.33
NetDS2_1: DS2.1 R7.1 | length 75.2
  Top Layer w10: R7.1 324.79,525 355,525 365,535 DS2.1
NetLED1_1: LED1.1 R5.2 | length 197
  Top Layer w6: LED1.1 1642.91,558.52 1649.5,565.11 v1(1649.5,568.5)
  Bottom Layer w6: R5.2 1607.72,497.72 1631.51,521.51 1631.51,550.51 v1(1649.5,568.5)
NetLED2_1: LED2.1 R6.2 | length 294.5
  Top Layer w6: LED2.1 1648.96,168.96 1648.96,152.41 v1(1650,151.37)
  Bottom Layer w6: R6.2@1525,232.72 1525,246.49 1569.53,291.02 1612.6,291.02 1649.94,253.67 1649.94,198.75 1650,198.7 v1(1650,151.37)
NetR5_1: R5.1 U2.23 | length 267.8
  Bottom Layer w6: U2.23 1343.91,496.13 1343.91,448.79 1377.69,415 1446.03,415 1493.32,462.28 R5.1
NetR6_1: R6.1 U2.22 | length 608
  Bottom Layer w6: U2.22 1318.32,496.13 1318.32,447.51 1360.82,405 1600,405 1605,400 1605,345 1585,325 1581.79,325 1509.66,252.87 1509.66,224.7 1516.47,217.88 1520.36,217.88 1523.88,214.37 1523.88,204.17 R6.1
RESET: C6.2 J1.3 J2.3 J4.5 R1.1 SW1.1 U1.29 | length 2637.6
  Top Layer w6: R1.1 956.6,537.72 960.11,534.2 960.11,519.17 980.29,498.99 980.29,491.12 1065,406.41 1065,389.51 1109.1,345.41 1109.1,343.36 1118.21,334.25 U1.29
  Top Layer w10: J2.3 465.15,635.15 510,635.15 548.85,674 581.15,674 625,630.15 625,610.86 639.86,596 684,596 760,520 781.18,520 SW1.1@791.93,509.25 ; SW1.1 SW1.1@791.93,509.25 ; R1.1 940,570 920,590 820,590 791.93,561.93 SW1.1@791.93,509.25
  Top Layer w12: J4.5 240,390 240,285 285,240 385,240 420.41,204.59 420.41,172.89 465,128.3 J1.3
  Bottom Layer w6: v1(1052.88,417.62) 1135.5,335 1390,335 1487.2,237.8 1487.2,205.96 1516.13,177.03 1537.79,177.03 1546.58,185.82 1546.58,212.03 1561.03,226.47 C6.2
  Bottom Layer w20: J4.5 175.48,455.48 175.48,505.48 261,591 432.72,591 448.43,606.72 448.43,607.61 465,624.18 J2.3
RX: R3.2 U2.1 | length 824.9
  Top Layer w6: R3.2 v1(900,565)
  Bottom Layer w6: v1(900,565) 900,524.81 916.98,507.84 977.16,507.84 1030,455 1030,395 1103,322 1383,322 1471.34,233.66 U2.1
TX: R2.2 U2.5 | length 767.9
  Top Layer w6: R2.2 v1(860,565)
  Bottom Layer w6: v1(860,565) 860,525 888,497 952.04,497 954.04,495 972.95,495 1019.72,448.23 1019.72,391.14 1098.86,312 1303,312 1368.98,246.02 U2.5
USBDM: J3.2 U2.16 | length 604.2
  Top Layer w8: v1(1560,385) 1560,343.83 1568.37,335.46 1607.77,335.46 J3.2
  Bottom Layer w6: U2.16 1164.25,395.75 1184.08,375.92 1549.49,375.92 1558.56,385 v1(1560,385)
USBDP: J3.3 U2.15 | length 581
  Top Layer w8: v1(1578,360) 1578.59,359.41 1609.41,359.41 J3.3
  Bottom Layer w6: U2.15 1138.66,406.85 1180.01,365.5 1565.92,365.5 1568.75,362.68 1575.32,362.68 v1(1578,360)
VIN: J2.1 U3.3 | length 443.4
  Top Layer w20: J2.1 285,655 322.77,655 346.77,679 383.23,679 415,647.23 415,622.77 482.77,555 527.3,555 539.01,543.28 U3.3
VUSB: C8.1 C9.2 D1.1 J3.1 | length 1951.6
  Top Layer w8: C9.2 943.21,169.28 949.84,175.91 949.84,184.84 v1(960,195) ; J3.1 1628.7,307.64 1632.57,303.76 1632.57,208 1651.75,188.83 1686.17,188.83 v1(1715,160)
  Top Layer w20: D1.1 v1(495,190) C8.1
  Bottom Layer w8: v1(495,190) 570,115 v1@715.69,115 ; v1(960,195) 915,150 751.32,150 716.32,115 v1(715.69,114.37) 1679.37,114.37 1696.04,131.04 1696.04,141.04 v1(1715,160)
pads on no net: J3.4 U2.3 U2.6 U2.8 U2.9 U2.10 U2.11 U2.12 U2.13 U2.14 U2.19 U2.24 U2.26 U2.27 U2.28

## Polygon pours and split planes (outlines as drawn)
GND on Layer 1 (GND) (split plane): 1751.56,20.1 20.1,20.1 20.1,688.56 1751.56,688.56
+5V on Layer 2 (PWR) (split plane): 1751.56,20.1 20.1,20.1 20.1,688.56 1751.56,688.56

## Silkscreen, mask and mechanical layers (free items; w line width, h text height)
Top Overlay:
  text "USB" at 1687.47,522.01 h25 r90
  text "+5V" at 353.19,518.41 h25 r90
  text "REG" at 376.59,514.56 h25 r90
  text "SCK" at 1119.59,512.89 h25 r90
  text "RESET" at 630,480 h25 r90
  text "16MHz" at 1080,310 h25 r90
  text "USB" at 1691.88,145.84 h25 r90
  text "ICSP" at 49.59,122.89 h25 r90
Bottom Overlay:
  text "A0" at 1379.43,581.54 h20 r90
  text "A2" at 1179.18,581.3 h20 r90
  text "A1" at 1280.35,577.96 h20 r90
  text "VIN" at 280,570 h20 r90
  text "GND" at 380,570 h20 r90
  text "RESET" at 480,570 h20 r90
  text "+5V" at 580,570 h20 r90
  text "A7" at 680,570 h20 r90
  text "A6" at 780,570 h20 r90
  text "A5" at 880,570 h20 r90
  text "A4" at 980,570 h20 r90
  text "A3" at 1080,570 h20 r90
  text "+3V3" at 1580,570 h20 r90
  text "D13/SCK" at 1673.85,568.88 h20 r90
  text "AREF" at 1501.79,553.4 h20
  text "ARDUINO NANO" at 360,475 h30 r90
  text "Designed by DJAMAL ZILAL" at 900,265 h15
  text "03-2024" at 900,245 h10
  text "D1/TX" at 280,240 h20 r90
  text "D0/RX" at 380,240 h20 r90
  text "RESET" at 480,240 h20 r90
  text "GND" at 580,200 h20 r90
  text "D12" at 1683.87,196.35 h20 r90
  text "D11" at 1582.28,186.78 h20 r90
  text "D2" at 680,180 h20 r90
  text "D3" at 780,180 h20 r90
  text "D4" at 880,180 h20 r90
  text "D5" at 980,180 h20 r90
  text "D6" at 1080,180 h20 r90
  text "D10" at 1514.96,165.3 h20 r90
  text "D7" at 1179.2,159.27 h20 r90
  text "D8" at 1280.45,156.89 h20 r90
  text "D9" at 1380.68,151.99 h20 r90

## Text inside footprints (layer, text, board x,y; h text height)
J3: Mechanical 1 "Board Edge" at 1790.31,297.11 h11.81 r90